# Altium PCB BreakoutV1.PcbDoc
Units mil, origin at the board's own origin, x right, y up, seen from the top; angles counter-clockwise.
Board outline 735 x 865 mil, 2 copper layers (Top Layer, Bottom Layer); 10 components, 8 nets, 25 pads, 0 vias.
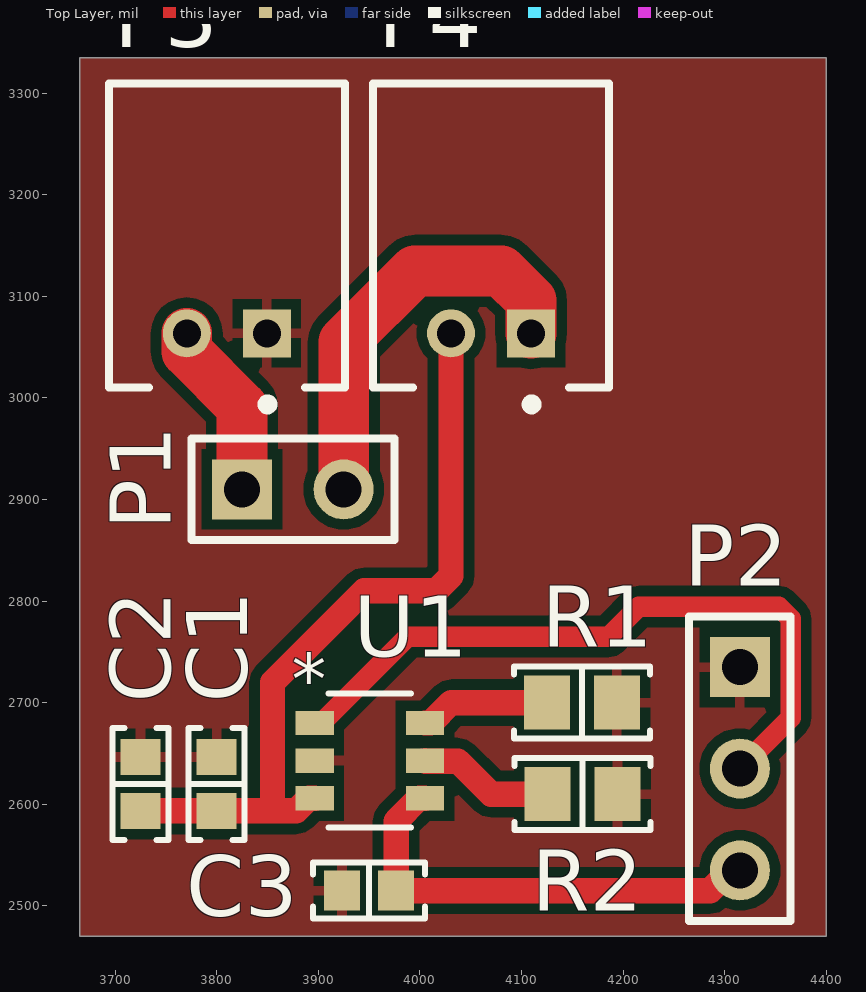
[diagram p0: Top Layer view]
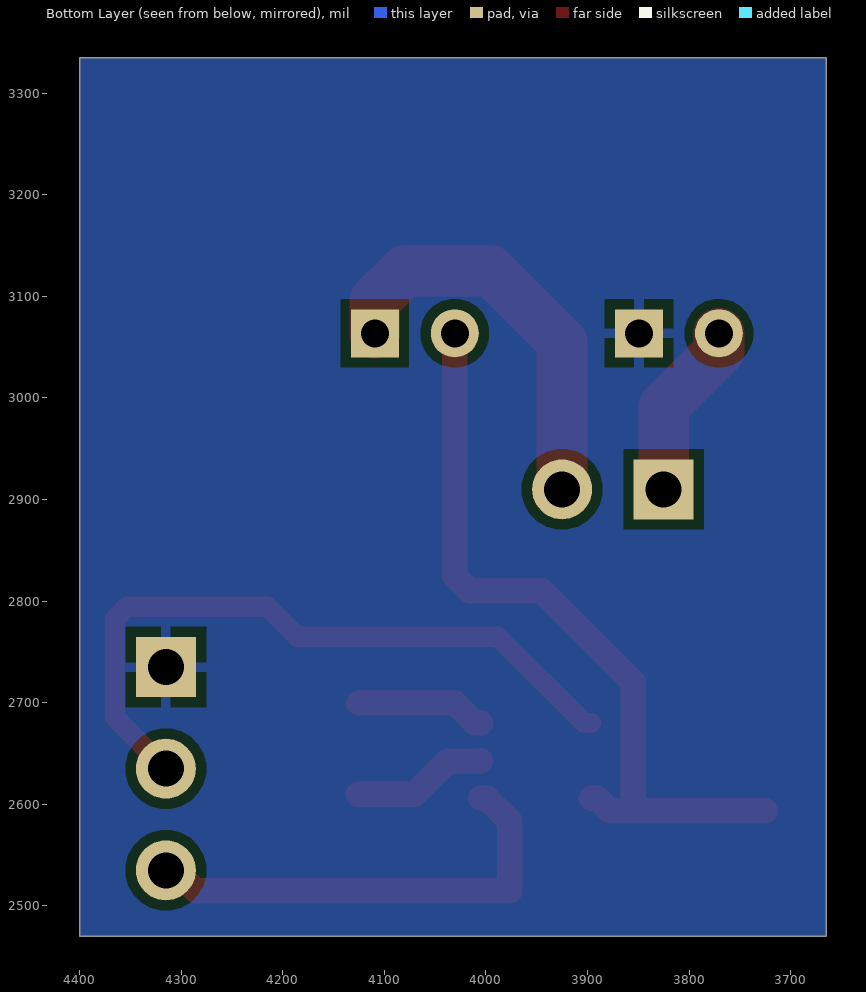
[diagram p1: Bottom Layer view, seen from below]
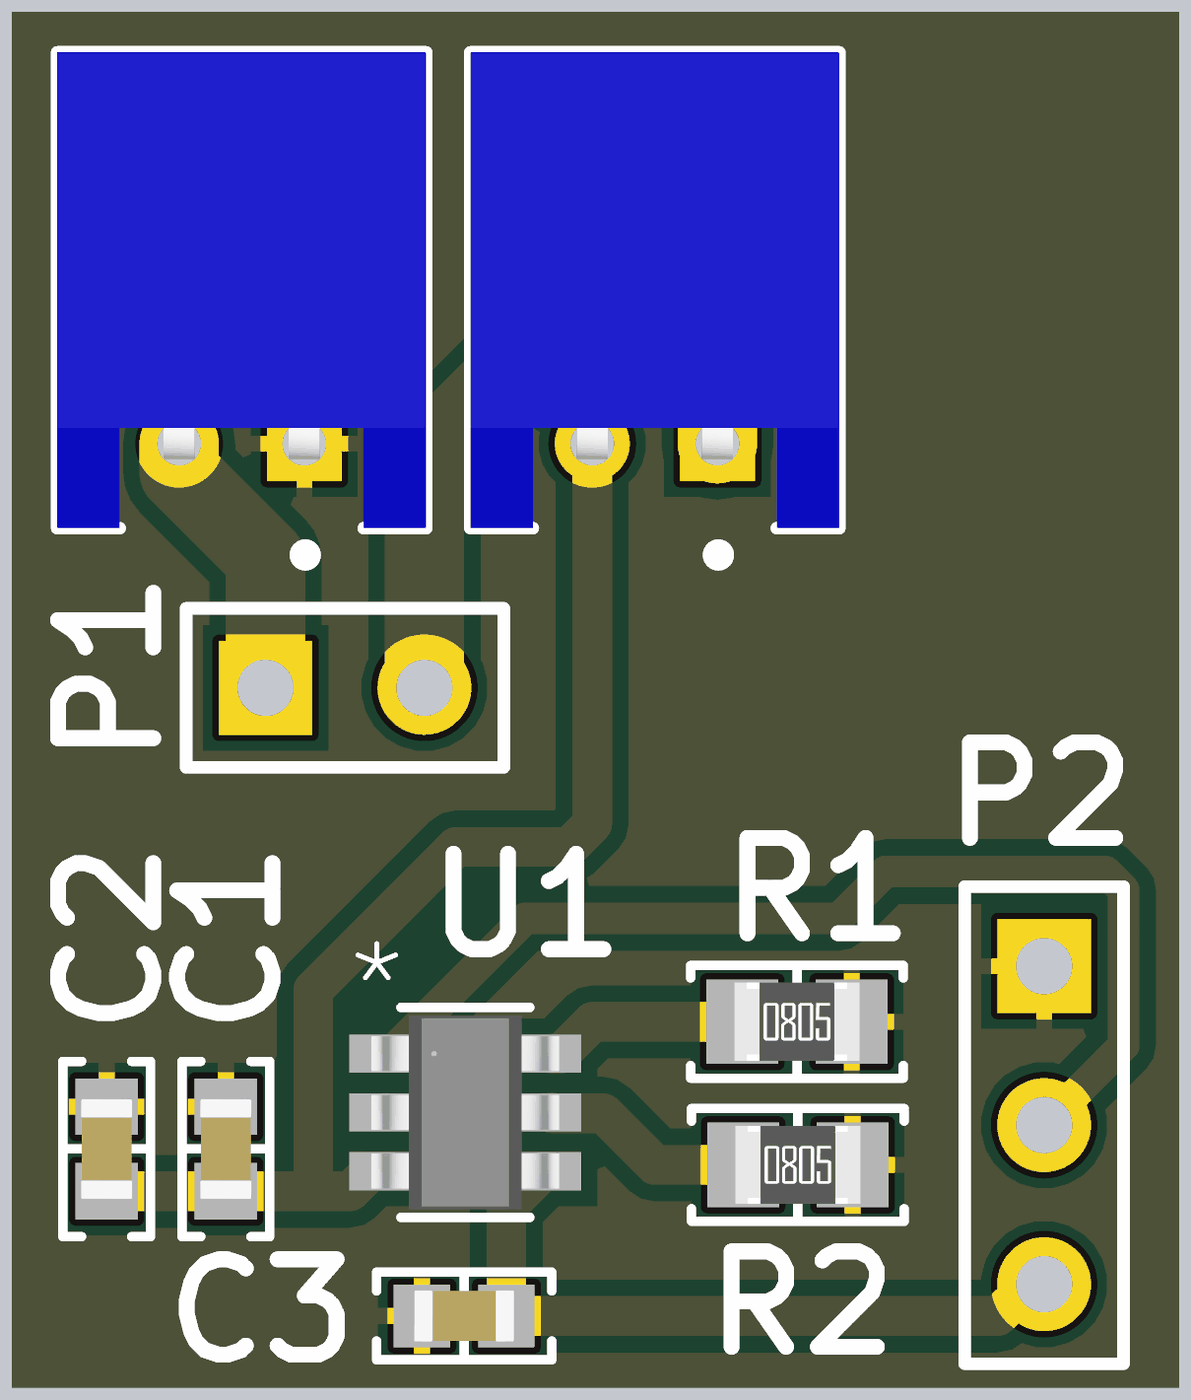
[diagram p2: 3D render of the assembled board from above, using the file's embedded part models]

## Layer stack, top to bottom
Top Solder: solder mask 0.4, Solder Resist, Dk 3.5
Top Layer: signal copper 1.4
Dielectric 1: dielectric 12.6, FR-4, Dk 4.8
Bottom Layer: signal copper 1.4
Bottom Solder: solder mask 0.4, Solder Resist, Dk 3.5

## Board outline
3665,2470 4400,2470 4400,3335 3665,3335

## Design rules (kind name [scope] priority, off if disabled: settings)
Clearance [All] p1: gap=10 ignorepadtopadclearanceinfootprint=FALSE except(0: Arc-Hole Track-Hole SMDPad-Hole THPad-Hole Via-Hole Fill-Hole Poly-Hole Region-Hole Text-Hole)
PlaneConnect [All] p1: planeconnectstyle=Direct reliefexpansion=20 reliefentries=4 reliefconductorwidth=10 reliefairgap=10
PolygonConnect [All] p1: connectstyle=Relief reliefconductorwidth=10 reliefentries=4 polygonreliefangle="90 Angle" airgapwidth=10
RoutingVias [All] p1: holewidth=28 width=50 viastyle="Through Hole" minholewidth=28 minwidth=50 maxholewidth=28 maxwidth=50
SolderMaskExpansion [All] p1: expansion=4 istentingtop=FALSE
Width [All] p1: maxlimit=70 minlimit=10 preferedwidth=10
29 further rules are at their usual default settings.

## Components (designator, comment, footprint, x,y, rotation, side; value= is the part's Value field where it differs from the comment)
C1 "1 µF" "CAP 0603_1608" 3800,2620 r270 top
C2 "10 µF" "CAP 0603_1608" 3725,2620 r270 top
C3 "1 µF" "CAP 0603_1608" 3950,2515 r0 top
P1 "Header 2" HDR1X2 3825,2910 r0 top
P2 "Header 3" HDR1X3 4315,2735 r270 top
P3 "S2B-PH-K-S(LF)(SN)" JST-S2B-PH-K-S_V 3810,3160 r180 top
P4 "S2B-PH-K-S(LF)(SN)" JST-S2B-PH-K-S_V 4070,3160 r180 top
R1 "110 kOhms" "RES 0805_2012" 4159.45,2700 r0 top
R2 "15 kOhms" "RES 0805_2012" 4160,2610 r0 top
U1 "RT9526AGE" SOT-23-6_RIT 3950.75,2643 r0 top

## Footprints (in the part's own frame and the unit in brackets; to place one, negate y for a bottom-side part, rotate by r counter-clockwise, add the part's x,y. Pads: shape width x height; smd on the part's side, far side on the other; paste and mask are expansions set on the pad)
"CAP 0603_1608" [mm] "Chip Capacitor, 2-Leads, Body 1.60x0.80mm, IPC Medium Density"
  rect 0.9x1 smd: 1(-0.675,0) 2(0.675,0)
  silkscreen extent -1.4,-0.7 1.4,0.7, body extent -0.8,-0.41 0.8,0.41, height 0.82
HDR1X2 [mm] "Connector; Header; 2 Position"
  rect 1.5x1.5 hole 0.9: 1(0,0)
  round 1.5 hole 0.9: 2(2.54,0)
  silkscreen extent -1.27,-1.27 3.81,1.27
HDR1X3 [mm] "Connector; Header; 3 Position"
  rect 1.5x1.5 hole 0.9: 1(0,0)
  round 1.5 hole 0.9: 2(2.54,0) 3(5.08,0)
  silkscreen extent -1.27,-1.27 6.35,1.27
JST-S2B-PH-K-S_V [mm] "THD, 2-Leads, Body 7.6x5.9mm, Pitch 2mm"
  rect 1.2x1.2 hole 0.7: 1(-1,2.45)
  round 1.2 hole 0.7: 2(1,2.45)
  silkscreen extent -2.95,-3.8 2.95,4.35, body extent -2.95,-3.8 2.95,3.8, height 4.8
"RES 0805_2012" [mm] "Chip Resistor, 2-Leads, Body 2.00x1.25mm, IPC Medium Density"
  rect 1.15x1.35 smd: 1(-0.875,0) 2(0.875,0)
  silkscreen extent -1.7,-0.9 1.7,0.9, body extent -1,-0.62 1,0.63, height 0.6
SOT-23-6_RIT [mil]
  rect 37.5x24 smd paste+0 mask+0: 1(-54.25,37) 2(-54.25,0) 3(-54.25,-37) 4(54.25,-37) 5(54.25,0) 6(54.25,37)
  silkscreen extent -40,-66 40,66, body extent -59,-61 59,61, height 51

## Part data
C1 C3: library part C1608X7R1C105K080AC, "CAP CER 1UF 16V X7R 0603", Device Package="0603 (1608 Metric)", manufacturer="TDK Corporation", Operating Temperature="-55°C ~ 125°C", Supplier Part Number 1=445-1604-1-ND, Temperature Coefficient=X7R, Tolerance=±10%, Voltage - Rated=16V, Applications="General Purpose", Capacitance="1 µF", componentlink1description=Datasheet, componentlink1url=https://product.tdk.com/info/en/catalog/datasheets/mlcc_commercial_general_en.pdf?ref_disty=digikey, componentlink2description="DigiKey Link", componentlink2url=https://www.digikey.com/en/products/detail/tdk-corporation/C1608X7R1C105K080AC/634395, Features="Low ESL", lastupdated="2023-01-03 8:06:54 PM", Lifecycle Status=Active, Minimum Order=1, Mounting Type="Surface Mount, MLCC", Package / Case="0603 (1608 Metric)", packaging=TapeAndReel, Part Number=C1608X7R1C105K080AC, Part Status=Active, partid=36324, price=0.01, series=C, Size / Dimension="0.063\" L x 0.031\" W (1.60mm x 0.80mm)", Supplier 1=DigiKey, Thickness (Max)="0.035\" (0.90mm)"
C2: library part GRM188R61E106KA73J, "CAP CER 10UF 25V X5R 0603", Device Package="0603 (1608 Metric)", manufacturer="Murata Electronics", Operating Temperature="-55°C ~ 85°C", Supplier Part Number 1=490-GRM188R61E106KA73JCT-ND, Temperature Coefficient=X5R, Tolerance=±10%, Voltage - Rated=25V, Applications="General Purpose", Capacitance="10 µF", componentlink1description=Datasheet, componentlink1url=https://search.murata.co.jp/Ceramy/image/img/A01X/G101/ENG/GRM188R61E106KA73-01A.pdf, componentlink2description="DigiKey Link", componentlink2url=https://www.digikey.com/en/products/detail/murata-electronics/GRM188R61E106KA73J/9887674, lastupdated="2023-01-03 8:06:37 PM", Lifecycle Status=Active, Minimum Order=1, Mounting Type="Surface Mount, MLCC", Package / Case="0603 (1608 Metric)", packaging=TapeAndReel, Part Number=GRM188R61E106KA73J, Part Status=Active, partid=39529, price=0.04, series=GRM, Size / Dimension="0.063\" L x 0.031\" W (1.60mm x 0.80mm)", Supplier 1=DigiKey, Thickness (Max)="0.039\" (1.00mm)"
P1: "Header, 2-Pin", LatestRevisionDate=17-Jul-2002, LatestRevisionNote="Re-released for DXP Platform.", Publisher="Altium Limited"
P2: "Header, 3-Pin", LatestRevisionDate=17-Jul-2002, LatestRevisionNote="Re-released for DXP Platform.", Publisher="Altium Limited"
P3 P4: library part CMP-1755-00004-1, "Male Header, Pitch 2 mm, 1 x 2 Position, Height 4.8 mm, Tail Length 3.4 mm, -25 to 85 degC, RoHS, Bulk", Capacitance="10 uF", Case\Package=Radial, Max Operating Temperature="85 degC", Min Operating Temperature="-40 degC", Package Quantity=200, Tolerance=20%, Voltage Rating="50 V", componentlink1description=Datasheet, componentlink1url=http://www.jst-mfg.com/product/pdf/eng/ePH.pdf, DatasheetVersion=Dec-12, Diameter="5 mm", Height="11 mm", Lead Pitch="2 mm", Length="11 mm", Mount="Through Hole", PackageDescription="Male Header, Pitch 2 mm, 1 x 2 Position, Height 4.8 mm, Tail Length 3.4 mm", PackageReference=S2B-PH-K-S, packaging=Bulk, Pins=2, Radiation Hardening=No, REACH SVHC="No SVHC", RoHSCompliant=true, Voltage Rating (DC)="50 V"
R1: library part RC0805FR-07110KL, "RES 110K OHM 1% 1/8W 0805", Device Package="0805 (2012 Metric)", manufacturer=Yageo, Operating Temperature="-55°C ~ 155°C", Power (Watts)="0.125W, 1/8W", Supplier Device Package=0805, Supplier Part Number 1=311-110KCRCT-ND, Temperature Coefficient=±100ppm/°C, Tolerance=±1%, componentlink1description=Datasheet, componentlink1url=https://www.yageo.com/upload/media/product/productsearch/datasheet/rchip/PYu-RC_Group_51_RoHS_L_10.pdf, componentlink2description="DigiKey Link", componentlink2url=https://www.digikey.com/en/products/detail/yageo/RC0805FR-07110KL/727560, Composition="Thick Film", Features="Moisture Resistant", Height - Seated (Max)="0.024\" (0.60mm)", lastupdated="2023-01-02 8:44:02 PM", Lifecycle Status=Active, Minimum Order=1, Number of Terminations=2, Package / Case="0805 (2012 Metric)", packaging=CutTape, Part Number=RC0805FR-07110KL, Part Status=Active, partid=39573, price=0.01, Resistance="110 kOhms", series=RC_L, Size / Dimension="0.079\" L x 0.049\" W (2.00mm x 1.25mm)", Supplier 1=DigiKey
R2: library part RC0805FR-1315KL, "RES 15K OHM 1% 1/8W 0805", Device Package="0805 (2012 Metric)", manufacturer=Yageo, Operating Temperature="-55°C ~ 155°C", Power (Watts)="0.125W, 1/8W", Supplier Device Package=0805, Supplier Part Number 1=13-RC0805FR-1315KLCT-ND, Temperature Coefficient=±100ppm/°C, Tolerance=±1%, componentlink1description=Datasheet, componentlink1url=https://www.yageo.com/upload/media/product/productsearch/datasheet/rchip/PYu-RC_Group_51_RoHS_L_11.pdf, componentlink2description="DigiKey Link", componentlink2url=https://www.digikey.com/en/products/detail/yageo/RC0805FR-1315KL/13694228, Composition="Thick Film", Features="Moisture Resistant", Height - Seated (Max)="0.024\" (0.60mm)", lastupdated="2023-01-02 8:42:49 PM", Lifecycle Status=Active, Minimum Order=1, Number of Terminations=2, Package / Case="0805 (2012 Metric)", packaging=CutTape, Part Number=RC0805FR-1315KL, Part Status=Active, partid=66554, price=0.01, Resistance="15 kOhms", series=RC_L, Size / Dimension="0.079\" L x 0.049\" W (2.00mm x 1.25mm)", Supplier 1=DigiKey
U1: "No Description Available", Mfr_Name="Richtek Technology", Copyright="Copyright (C) 2023 Ultra Librarian. All rights reserved.", Digi-Key_Part_Number_1=1028-1359-2-ND, Digi-Key_Part_Number_2=1028-1359-1-ND, Digi-Key_Part_Number_3=1028-1359-6-ND, Manufacturer_Part_Number=RT9526AGE, RefDes=RefDes, Type=DEV

## Nets (pads, with @x,y where several pads share a name; then routed paths per layer and width w, separated by ;. In a path a pad name is that pad's centre, name@x,y a point inside that pad or via, vN(x,y) a via of type N, cw(c..) or ccw(c..) an arc to the next point about the centre after c; other vN are vias at no path point)
GND: C1.1 C2.1 C3.1 P2.1 P3.1 R1.2 R2.2 U1.2
NetC1_2: C1.2 C2.2 P4.2 U1.3 | length 761.2
  Top Layer w25: C2.2 C1.2 3855,2593.43 ; U1.3 3890.75,2606 3878.18,2593.43 3855,2593.43 ; P4.2 4030.63,2824.64 4015.99,2810 3945,2810 3855,2720 3855,2593.43
NetC3_2: C3.2 P2.3 U1.4 | length 452.9
  Top Layer w25: U1.4 3999.25,2606 3976.57,2583.32 C3.2 4285.78,2515 4305.78,2535 P2.3
NetP1_1: P1.1 P3.2 | length 176.1
  Top Layer w50: P3.2 3770.63,3045.54 3825,2991.17 P1.1
NetP1_2: P1.2 P4.1 | length 402.7
  Top Layer w50: P1.2 3925,3055 3995,3125 4080.08,3125 4109.37,3095.71 P4.1
NetP2_2: P2.2 U1.1 | length 689.3
  Top Layer w20: U1.1 3903.25,2680 3988.25,2765 4185.77,2765 4215.29,2794.53 4353.28,2794.53 4365,2782.81 4365,2685 P2.2
NetR1_1: R1.1 U1.6 | length 128.3
  Top Layer w25: U1.6 4010.75,2680 4030.75,2700 R1.1
NetR2_1: R2.1 U1.5 | length 134.2
  Top Layer w25: U1.5 4005.5,2642.5 4037.5,2642.5 4070,2610 R2.1

## Polygon pours and split planes (outlines as drawn)
GND on Top Layer "GND_L01_P001" (solid, pour order 1): 3665,3335 4400,3335 4400,2470 3665,2470
GND on Bottom Layer "GND_L02_P000" (solid, pour order 0): 3665,3335 4400,3335 4400,2470 3665,2470

## Text inside footprints (layer, text, board x,y; h text height)
U1: Top Overlay "*" at 3874,2699 h50; Mechanical 13 "*" at 3917.75,2651 h50